# Altium PCB PCB_worm_robot_control_v1.PcbDoc
Units mm, origin at the board's own origin, x right, y up, seen from the top; angles counter-clockwise.
Board outline 255.84 x 36.78 mm, 2 copper layers (Top Layer, Bottom Layer); 47 components, 54 nets, 389 pads, 33 vias.
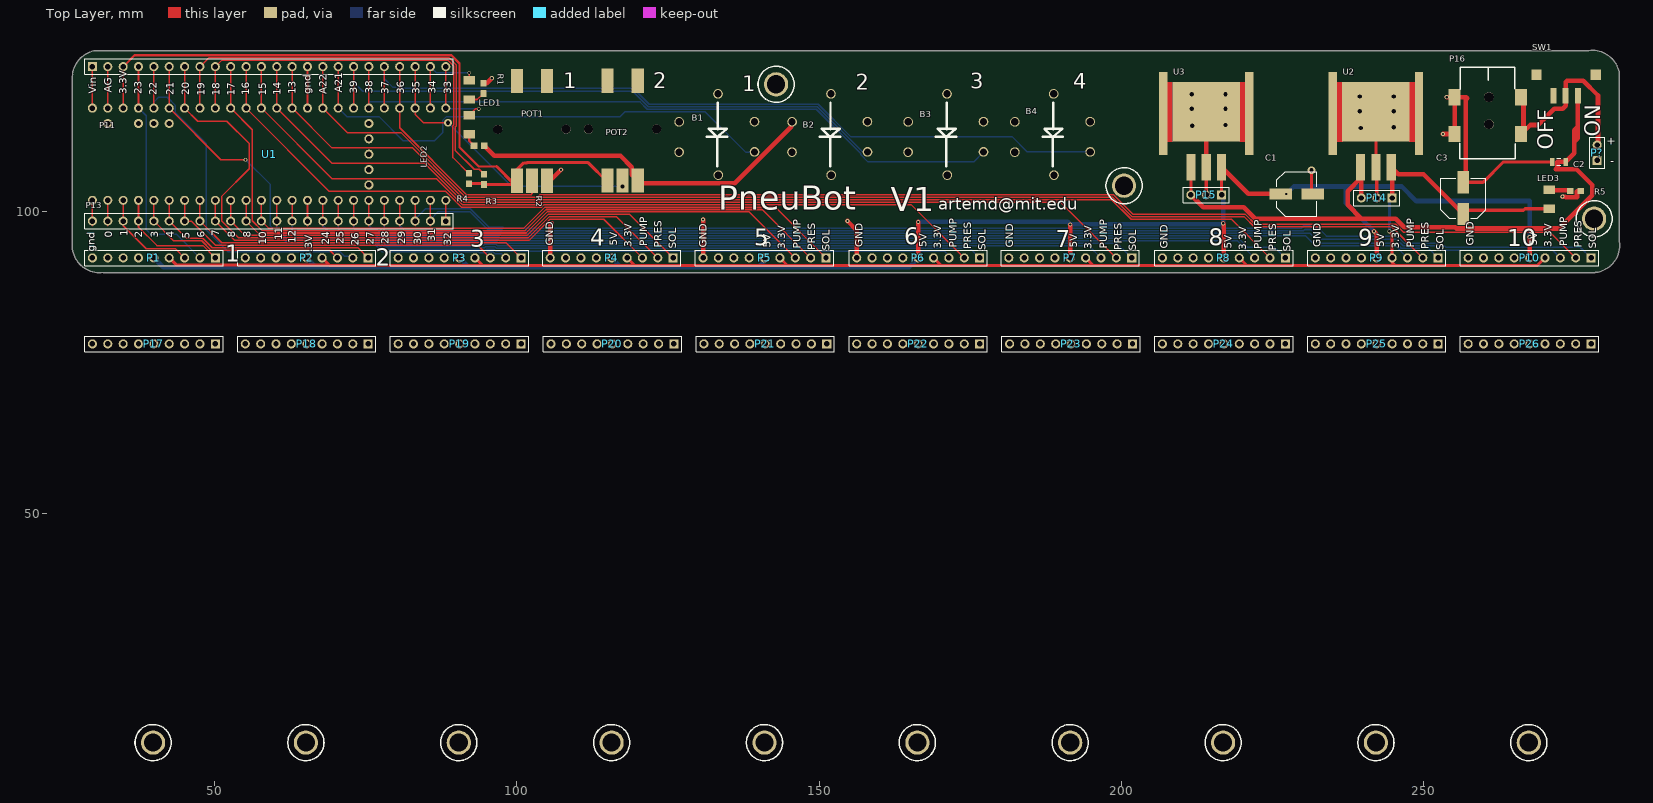
[diagram p0: Top Layer view]
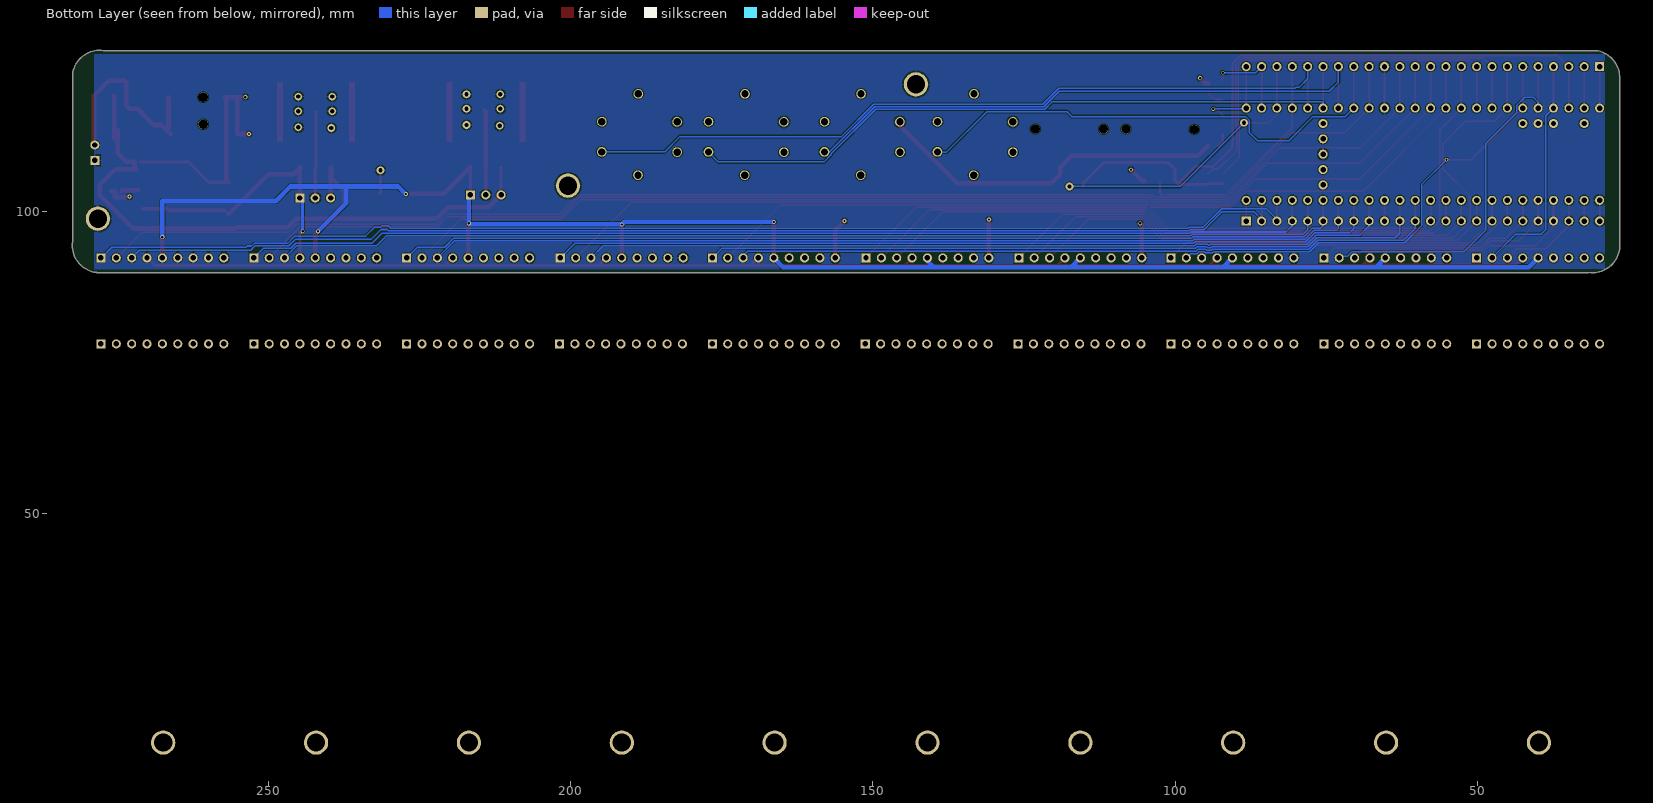
[diagram p1: Bottom Layer view, seen from below]

## Layer stack, top to bottom
Top Solder: solder mask 0.0102, Solder Resist, Dk 3.5
Top Layer: signal copper 0.0356
Dielectric 1: dielectric 0.32, FR-4, Dk 4.8
Bottom Layer: signal copper 0.0356
Bottom Solder: solder mask 0.0102, Solder Resist, Dk 3.5

## Board outline
26.545,93.819 cw(c26.797,93.853) 26.543,93.853 26.543,121.592 cw(c31.06,122.111) 30.455,126.617 cw(c30.489,126.365) 30.609,126.589 cw(c30.729,126.365) 30.729,126.619 277.224,126.619 cw(c277.812,122.111) 282.319,122.716 cw(c282.067,122.682) 282.321,122.682 cw(c282.067,122.682) 282.313,122.618 cw(c282.067,122.555) 282.321,122.555 282.321,95.013 cw(c277.812,94.424) 282.36,94.424 cw(c277.812,94.424) 278.418,89.918 cw(c278.384,90.17) 278.32,89.924 cw(c278.257,90.17) 278.257,89.916 31.64,89.916 cw(c31.051,94.424)

## Design rules (kind name [scope] priority, off if disabled: settings)
Clearance [All] p1: gap=0.152 ignorepadtopadclearanceinfootprint=FALSE
PolygonConnect [All] p1: connectstyle=Relief reliefconductorwidth=0.254 reliefentries=4 polygonreliefangle="90 Angle" airgapwidth=0.254
RoomDefinition Schematic_worm_robot_control_v1 [InComponentClass('Schematic_worm_robot_control_v1')] p1 off: confinementstyle=ConfineIn formatcopy=TRUE lockcomponents=FALSE outline 283.464,91.313 295.275,91.313 295.275,110.744 283.464,110.744
RoutingVias [All] p1: holewidth=0.381 width=0.635 viastyle="Through Hole" minholewidth=0.381 minwidth=0.635 maxholewidth=0.711 maxwidth=1.27
SolderMaskExpansion [All] p1: expansion=0.102
Width [All] p1: maxlimit=0.762 minlimit=0.152 preferedwidth=0.254
30 further rules are at their usual default settings.

## Classes and differential pairs
component class Schematic_worm_robot_control_v1: B1 B2 B3 B4 C1 C2 C3 LED1 LED2 LED3 P1 P2 P3 P4 P5 P6 P7 P8 P9 P10 P11 P13 P14 P15 P16 P? POT1 POT2 POT? R1 R2 R3 R4 R5 SW1 U1 U2 U3

## Components (designator, comment, footprint, x,y, rotation, side; value= is the part's Value field where it differs from the comment)
B1 "BUTTON 12MM LED LIGHT" "12MM BUTTON LED LIGHT" 132.005,109.094 r180 top
B2 "BUTTON 12MM LED LIGHT" "12MM BUTTON LED LIGHT" 150.674,109.094 r180 top
B3 "BUTTON 12MM LED LIGHT" "12MM BUTTON LED LIGHT" 169.861,109.094 r180 top
B4 "BUTTON 12MM LED LIGHT" "12MM BUTTON LED LIGHT" 187.504,109.094 r180 top
C1 "Electrolytic Cap 100uF smd" "F80 Electrolytic cap" 228.981,102.87 r0 top
C2 "10uF 16V" CAP0805 272.288,108.204 r180 top
C3 "Electrolytic Cap 100uF smd" "F80 Electrolytic cap" 256.54,102.235 r90 top
LED1 "LED BLUE" RES_1206_SMD 93.091,120.142 r270 top
LED2 "LED RED" RES_1206_SMD 93.091,114.427 r270 top
LED3 "LED BLUE" RES_1206_SMD 269.769,101.981 r90 top
P1 "Header 9" HDR1X9 50.165,92.329 r180 top
P2 "Header 9" HDR1X9 75.438,92.329 r180 top
P3 "Header 9" HDR1X9 100.711,92.329 r180 top
P4 "Header 9" HDR1X9 125.857,92.329 r180 top
P5 "Header 9" HDR1X9 151.13,92.329 r180 top
P6 "Header 9" HDR1X9 176.53,92.329 r180 top
P7 "Header 9" HDR1X9 201.676,92.329 r180 top
P8 "Header 9" HDR1X9 227.076,92.329 r180 top
P9 "Header 9" HDR1X9 252.349,92.329 r180 top
P10 "Header 9" HDR1X9 277.622,92.329 r180 top
P11 "Header 24" HDR1X24 29.845,123.952 r0 top
P13 "Header 24" HDR1X24 88.265,98.425 r180 top
P14 "Header 3" HDR1X3 244.729,102.235 r180 top
P15 "Header 3" HDR1X3 216.535,102.743 r180 top
P16 "Barrel jack 5.5/2.1" ADC-028-2 260.941,121.221 r270 top
P17 "Header 9" HDR1X9 50.165,78.105 r180 top (schematic designator P2)
P18 "Header 9" HDR1X9 75.438,78.105 r180 top (schematic designator P2)
P19 "Header 9" HDR1X9 100.711,78.105 r180 top (schematic designator P2)
P20 "Header 9" HDR1X9 125.984,78.105 r180 top (schematic designator P2)
P21 "Header 9" HDR1X9 151.257,78.105 r180 top (schematic designator P2)
P22 "Header 9" HDR1X9 176.53,78.105 r180 top (schematic designator P2)
P23 "Header 9" HDR1X9 201.803,78.105 r180 top (schematic designator P2)
P24 "Header 9" HDR1X9 227.076,78.105 r180 top (schematic designator P2)
P25 "Header 9" HDR1X9 252.349,78.105 r180 top (schematic designator P2)
P26 "Header 9" HDR1X9 277.622,78.105 r180 top (schematic designator P2)
P? "Header 2" HDR1X2 278.638,108.458 r90 top
POT1 "Potentiometer large" PRS11S 101.981,113.641 r0 top
POT2 "Potentiometer large" PRS11S 116.967,113.665 r0 top
R1 "330" 0603W 94.488,120.396 r270 top
R2 "330" 0603W 93.801,110.871 r180 top
R3 "10K" 0603W 94.615,105.283 r90 top
R4 "10K" 0603W 92.075,105.423 r90 top
R5 "330" 0603W 275.082,103.378 r180 top
SW1 "ON_OFF_SWITCH" "SS321 Switch" 275.417,119.059 r270 top
U1 "TEENSY 3.6" "TEENSY 3.6" 45.663,110.003 r90 top
U2 "MIC29300" TO263 240.481,109.908 r0 top
U3 "MIC29300" TO263 212.414,109.908 r0 top

## Footprints (in the part's own frame and the unit in brackets; to place one, negate y for a bottom-side part, rotate by r counter-clockwise, add the part's x,y. Pads: shape width x height; smd on the part's side, far side on the other; paste and mask are expansions set on the pad)
"12MM BUTTON LED LIGHT" [mm]
  round 1.6 hole 1.2: 1(-7.314,-0.761) 2(5.16,-0.722) 3(-7.304,-5.751) 4(5.152,-5.732) 5(-1.274,-10.357) 6(-1.319,3.084)
  silkscreen extent -2.79,-8.92 0.56,1.6, body extent -7.52,-9.59 5.18,2.41, height 7.68
0603W [mm]
  rect 1.1x1 smd: 1(-0.825,0) 2(0.875,0)
  body extent -0.8,-0.4 0.8,0.4, height 0.45
ADC-028-2 [mm] "2.1/5.5mm barrel jack"
  rect 2.7x2 smd: 1(2.308,5.112) 1(8.408,5.112) 2(2.308,-5.888) 2(8.408,-5.888)
  round 1.6 hole 1.6: 2(2.309,-0.204) 3(6.794,-0.21)
  silkscreen extent -2.62,-5 12.5,4.11, body extent -2.57,-6.81 12.23,6.02, height 11.5
CAP0805 [mm]
  rect 0.75x1.35 smd: 1(-1.133,0.003) 2(1.117,0.003)
  silkscreen extent -0.36,-0.57 0.34,0.58, body extent -1.01,-0.62 0.99,0.63, height 0.78
"F80 Electrolytic cap" [mm]
  rect 3.7x1.85 smd: 1(-2.653,0.04) 2(2.597,0.04)
  silkscreen extent -3.33,-3.66 3.27,3.74, body extent -3.43,-3.66 3.37,3.74, height 8
HDR1X2 [mm] "Connector; Header; 2 Position"
  rect 1.5x1.5 hole 0.9: 1(0,0)
  round 1.5 hole 0.9: 2(2.54,0)
  silkscreen extent -1.27,-1.27 3.81,1.27
HDR1X3 [mm] "Connector; Header; 3 Position"
  rect 1.5x1.5 hole 0.9: 1(0,0)
  round 1.5 hole 0.9: 2(2.54,0) 3(5.08,0)
  silkscreen extent -1.27,-1.27 6.35,1.27
HDR1X9 [mm] "Connector; Header; 9 Position"
  rect 1.5x1.5 hole 0.9: 1(0,0)
  round 1.5 hole 0.9: 2(2.54,0) 3(5.08,0) 4(7.62,0) 5(10.16,0) 6(12.7,0) 7(15.24,0) 8(17.78,0) 9(20.32,0)
  silkscreen extent -1.27,-1.27 21.59,1.27
HDR1X24 [mm] "Connector; Header; 24 Position"
  rect 1.5x1.5 hole 0.9: 1(0,0)
  round 1.5 hole 0.9: 2(2.54,0) 3(5.08,0) 4(7.62,0) 5(10.16,0) 6(12.7,0) 7(15.24,0) 8(17.78,0) 9(20.32,0) 10(22.86,0) 11(25.4,0) 12(27.94,0) 13(30.48,0) 14(33.02,0) 15(35.56,0) 16(38.1,0) 17(40.64,0) 18(43.18,0) 19(45.72,0) 20(48.26,0) 21(50.8,0) 22(53.34,0) 23(55.88,0) 24(58.42,0)
  silkscreen extent -1.27,-1.27 59.69,1.27
PRS11S [mm] "SMD Potentiometer"
  rect 2x4 smd: 1(-1.956,-8.544) 2(0.544,-8.544) 3(3.044,-8.544) 4(-1.956,7.956) 5(3.044,7.956)
  round 1.5 hole 1.5: 6(-5.121,-0.056) 7(6.178,-0.024)
  body extent -6.01,-9.33 6.99,9.17, height 20
RES_1206_SMD [mm]
  rect 1.4x1.9 smd: 1(-1.525,-0.95) 2(1.625,-0.95)
  body extent -1.55,-1.9 1.8,0, height 0.5
"SS321 Switch" [mm] "SPDT Slide Switch"
  rect 2.55x1 smd: 1(-0.067,-3.987) 2(-0.067,-1.986) 3(-0.067,0.017)
  rect 1.7x1.7 smd: 4(-3.54,-6.814) 5(-3.547,2.985)
  body extent -6.86,-7.15 0.53,3.34, height 3.05
"TEENSY 3.6" [mm]
  round 1.5 hole 0.9: 1(-8.149,15.818) 2(-8.149,13.278) 3(-8.149,10.738) 4(-8.149,8.198) 5(-8.149,5.658) 6(-8.149,3.118) 7(-8.149,0.578) 8(-8.149,-1.962) 9(-8.149,-4.502) 10(-8.149,-7.042) 11(-8.149,-9.582) 12(-8.149,-12.122) 13(-8.149,-14.662) 14(-8.149,-17.202) 15(7.091,-17.202) 16(7.091,-14.662) 17(7.091,-12.122) 18(7.091,-9.582) 19(7.091,-7.042) 20(7.091,-4.502) 21(7.091,-1.962) 22(7.091,0.578) 23(7.091,3.118) 24(7.091,5.658) 25(7.091,8.198) 26(7.091,10.738) 27(7.091,13.278) 28(7.091,15.818) 29(-5.609,-29.902) 30(-3.069,-29.902) 31(-0.529,-29.902) 32(2.011,-29.902) 33(4.551,-29.902) 34(4.551,13.278) 35(4.551,8.198) 36(4.551,5.658) 37(4.551,3.118) 38(-8.149,-19.742) 39(-8.149,-22.282) 40(-8.149,-24.822) 41(-8.149,-27.362) 42(-8.149,-29.902) 43(-8.149,-32.442) 44(-8.149,-34.982) 45(-8.149,-37.522) 46(-8.149,-40.062) 47(-8.149,-42.602) 48(7.091,-19.742) 49(7.091,-22.282) 50(7.091,-24.822) 51(7.091,-27.362) 52(7.091,-29.902) 53(7.091,-32.442) 54(7.091,-34.982) 55(7.091,-37.522) 56(7.091,-40.062) 57(7.091,-42.602)
  body extent -9.34,-43.87 8.53,18.09, height 7.29
TO263 [mil] "voltage regulator high currrent"
  rect 60x170 smd: 1(-37.74,-102.1) 2(62.26,-102.1) 3(162.26,-102.1)
  rect 440x390 smd: 4(61.33,259.49)
  body extent -136,-155 258,471, height 169

## Part data
C1 C3: "100uF 25 VSMD", digikey part number=565-2549-1-ND, manufacturer="United Chemi-Con", manufacturer part number=EMZA250ADA101MF80G, Supplier Part Number 1=565-2549-6-ND, Supplier 1=Digikey
C2: library part "Polarized Cap"
LED1 LED3: library part LED, "LED SMD 1206/0603", Supplier Part Number 1=LNJ947W8CRACT-ND, Supplier 1=Digikey
LED2: library part LED, "LED SMD 1206/0603", Supplier Part Number 1=LNJ247W82RACT-ND, Supplier 1=Digikey
P1 P2 P3 P4 P5 P6 P7 P8 P9 P10 P17 P18 P19 P20 P21 P22 P23 P24 P25 P26: "Header, 9-Pin", LatestRevisionDate=17-Jul-2002, LatestRevisionNote="Re-released for DXP Platform.", Publisher="Altium Limited"
P11 P13: "Header, 24-Pin", LatestRevisionDate=17-Jul-2002, LatestRevisionNote="Re-released for DXP Platform.", Publisher="Altium Limited"
P14 P15: "Header, 3-Pin", LatestRevisionDate=17-Jul-2002, LatestRevisionNote="Re-released for DXP Platform.", Publisher="Altium Limited"
P16: sparkfun part number=12748
P?: "Header, 2-Pin", LatestRevisionDate=17-Jul-2002, LatestRevisionNote="Re-released for DXP Platform.", Publisher="Altium Limited"
POT1 POT2: "SMD Large pot for audio", Supplier Part Number 1=PRS11S-N20F-103B1-ND, Supplier 1=Digikey
R1 R2 R5: library part Resistor, Supplier Part Number 1=311-330JRCT-ND, digikey number=RMCF0603FT10K0CT-ND, Supplier 1=Digikey
R3 R4: library part Resistor, Supplier Part Number 1=311-10KJRCT-ND, Supplier 1=Digikey
SW1: "SPDT SMD Side Switch", digikey number=563-1102-1-ND, Sparkfun#=COM-00597
U2 U3: "3A LDO", Supplier Part Number 1=MIC29300-3.3WU-CT-ND, Supplier 1=Digi-Key

## Free pads (board coordinates)
  round 4 hole 3: 11(39.87,12.192) 11(65.143,12.192) 11(90.416,12.192) 11(115.689,12.192) 11(140.962,12.192) 11(142.875,121.031) 11(166.235,12.192) 11(191.508,12.192) 11(200.406,104.267) 11(216.781,12.192) 11(242.054,12.192) 11(267.327,12.192) 11(278.13,98.806)
  rect 1.4x13.72 smd: 19(206.883,116.205) 19(221.107,116.205) 19(234.95,116.205) 19(249.174,116.205)

## Via types
v1: diameter 0.635, hole 0.381, Top Layer to Bottom Layer, tented both sides, 18 vias
v2: diameter 1.27, hole 0.711, Top Layer to Bottom Layer, 12 vias
v3: diameter 1.27, hole 0.711, Top Layer to Bottom Layer, tented both sides, 3 vias

## Nets (pads, with @x,y where several pads share a name; then routed paths per layer and width w, separated by ;. In a path a pad name is that pad's centre, name@x,y a point inside that pad or via, vN(x,y) a via of type N, cw(c..) or ccw(c..) an arc to the next point about the centre after c; other vN are vias at no path point)
3.3V_MCU: P11.3 POT1.1 POT2.1 R3.1 R4.1 U1.26 | length 116.9
  Top Layer w0.254: U1.26 P11.3
  Top Layer w0.381: P11.3 36.831,125.858 89.183,125.858 90.551,124.49 90.551,110.617 93.726,107.442 96.687,107.442
  Top Layer w0.508: R4.1 94.475,104.598 R3.1 99.386,104.458 POT1.1@99.529,104.601 ; 96.687,107.442 POT1.1@99.529,104.601 ; POT2.1@115.011,104.867 111.8,108.077 101.716,108.077 101.69,108.052 101.168,108.052 100.025,106.908 POT1.1 POT1.1@99.529,104.601 ; POT2.1@115.054,104.91 115.138,104.826 POT2.1@115.138,104.105
3.3V_MOTORS: C3.1 LED3.1 P1.4 P2.4 P3.4 P4.4 P5.4 P6.4 P7.4 P8.4 P9.4 P10.4 P14.1 U2.3 | length 287.3
  Top Layer w0.508: P1.4 43.701,91.173 68.821,91.173 68.897,91.249 ; P2.4 68.897,91.249 ; P3.4 94.361,91.059 ; P4.4 119.507,91.059 ; P5.4 144.78,91.059 ; P6.4 170.18,91.059 ; P7.4 195.326,91.059 ; P8.4 220.726,91.059 ; v1(244.274,96.721) 244.729,96.266 P9.4 244.729,91.567 245.237,91.059 ; C3.1 257.121,100.203 266.46,100.203 266.713,100.456 LED3.1 ; P10.4 268.732,91.059 245.237,91.059 ; 68.897,91.249 69.088,91.059 94.361,91.059 ; 94.361,91.059 119.507,91.059 ; 119.507,91.059 144.78,91.059 ; 144.78,91.059 170.18,91.059 ; 170.18,91.059 195.326,91.059 ; 195.326,91.059 220.726,91.059 ; 220.726,91.059 245.237,91.059
  Top Layer w0.762: U2.3 U2.3@244.729,107.188 ; P14.1 U2.3@244.729,107.188 ; C3.1 249.911,106.172 245.745,106.172 U2.3@244.729,107.188
  Bottom Layer w0.508: v1(244.274,96.721) 244.274,101.78 P14.1
5V: C1.1 P1.5 P2.5 P3.5 P4.5 P5.5 P6.5 P7.5 P8.5 P9.5 P10.5 P15.1 U3.3 | length 290
  Top Layer w0.508: P15.1 U3.3
  Top Layer w0.762: P6.5 v1(166.37,98.276) ; P7.5 v1(191.516,97.836) ; U3.3 220.94,102.91 C1.1 ; v1(216.789,98.044) 216.916,97.917 P8.5 ; v1(241.734,96.721) 242.189,96.266 P9.5 ; P10.5 v1(267.462,95.758)
  Bottom Layer w0.762: P1.5 41.529,90.805 66.802,90.805 ; P2.5 66.802,90.805 ; P3.5 92.075,90.805 ; P4.5 117.221,90.805 ; P5.5 140.97,91.821 139.954,90.805 ; P6.5 164.846,90.805 139.954,90.805 ; v1(166.37,98.276) 191.076,98.276 191.46,97.892 216.637,97.892 v1(216.789,98.044) 216.789,102.489 P15.1 ; v1(227.203,102.879) 228.464,104.14 237.109,104.14 ; v1(241.734,96.721) 237.109,101.346 237.109,104.14 ; v1(267.462,95.758) 267.462,101.729 248.712,101.729 246.301,104.14 237.109,104.14 ; 66.802,90.805 92.075,90.805 ; 92.075,90.805 117.221,90.805 ; 117.221,90.805 139.954,90.805
9V: P16.1 P?.2 SW1.2 | length 33
  Top Layer w0.762: P16.1@266.053,112.814 267.539,114.3 268.859,114.3 271.526,116.967 272.923,116.967 273.431,117.475 SW1.2 273.431,121.412 273.64,121.621 276.328,121.621 278.765,119.184 P?.2@278.765,110.998 ; P16.1@266.46,113.778 P16.1@266.46,118.912
BUTTON_1: B1.1 P11.17 U1.50 | length 83.9
  Top Layer w0.254: U1.50 P11.17
  Bottom Layer w0.254: U1.50 71.882,115.697 77.216,115.697 81.199,111.714 86.423,111.714 87.732,113.023 87.732,115.06 88.369,115.697 117.094,115.697 117.907,116.51 131.14,116.51 137.832,109.818 B1.1@139.319,109.818
BUTTON_2: B2.1 P11.18 U1.51 | length 99.2
  Top Layer w0.254: U1.51 P11.18
  Bottom Layer w0.254: P11.18 73.025,121.412 74.549,119.888 119.186,119.888 121.752,117.323 149.698,117.323 157.203,109.818 B2.1@157.988,109.818
BUTTON_3: B3.1 P11.19 U1.52 | length 114.4
  Top Layer w0.254: U1.52 P11.19
  Bottom Layer w0.254: U1.52 75.565,118.123 120.376,118.123 121.583,116.916 149.53,116.916 156.909,109.537 156.909,109.371 158.075,108.204 175.561,108.204 B3.1@177.175,109.818
BUTTON_4: B4.1 P11.20 U1.53 | length 130.6
  Top Layer w0.254: U1.53 P11.20
  Bottom Layer w0.254: P11.20 78.105,121.954 79.536,120.523 80.078,120.523 80.219,120.383 119.266,120.383 121.92,117.729 149.866,117.729 155.2,112.395 181.882,112.395 184.422,109.855 B4.1
GND: B1.4 B2.4 B3.4 B4.4 C1.2 C2.2 C3.2 P1.9 P2.9 P3.9 P4.9 P5.9 P6.9 P7.9 P8.9 P9.9 P10.9 P11.15 P13.24 P14.2 P15.2 P16.2@255.053,112.814 P16.2@255.053,118.914 P?.1 pad.11@142.875,121.031 pad.11@200.406,104.267 pad.11@278.13,98.806 pad.19 POT1.3 POT2.3 R1.1 R2.1 R5.1 U1.1 U1.31 U1.48 U2.2 U2.4 U3.2 U3.4 | length 171.2
  Top Layer w0.254: 29.845,97.663 P13.24 U1.1 ; U1.48 P11.15 ; U3.2@213.995,106.807 U3.2
  Top Layer w0.508: P15.2 U3.2@213.995,106.807 ; U3.4@214.225,116.88 U3.4@214.249,116.857 ; v3(231.394,106.807) 231.394,103.094 C1.2 ; U2.4 242.062,116.476 U2.2 242.189,107.188 P14.2 ; C3.2@256.921,104.832 259.772,104.832 263.141,108.201 C2.2
  Top Layer w0.762: R1.1 95.059,121.221 v1(95.885,122.047) ; R2.1 96.266,109.231 117.155,109.231 119.044,107.342 119.044,106.087 POT2.3 120.455,104.677 136.026,104.677 145.361,114.012 145.361,114.629 B2.4@145.522,114.789 ; POT1.3 105.504,105.097 v1(107.315,106.908) ; P4.9 105.537,97.79 v1(105.791,98.044) ; P5.9 v1(130.81,98.679) ; v1(154.686,98.425) 156.21,96.901 P6.9 ; U3.2 U3.4@213.995,116.476 ; v1(253.149,112.814) 255.053,112.814 P16.2@255.053,118.914 ; v1(253.742,118.914) P16.2@255.053,118.914 ; C3.2 256.921,104.832 256.921,118.491 257.175,118.745 257.006,118.914 P16.2@255.053,118.914 ; v1(272.902,102.468) 273.313,102.468 273.436,102.345 275.29,102.345 275.29,103.378 R5.1
  other v2: 239.522,113.792 244.983,113.919 211.709,114.173 217.17,114.3 239.395,116.586 244.983,116.586 211.582,116.967 217.17,116.967 239.395,118.999 244.983,118.999 211.582,119.38 217.17,119.38
LED_1: LED1.1 P11.23 U1.56 | length 15.2
  Top Layer w0.254: U1.56 P11.23 ; LED1.1 v1(92.141,122.936)
  Bottom Layer w0.254: U1.56@85.546,116.915 U1.56 ; P11.23 86.754,122.923 91.427,122.923 91.44,122.936 v1(92.141,122.936)
LED_2: LED2.1 P11.24 U1.57 | length 14.4
  Top Layer w0.254: U1.57 P11.24 ; LED2.1 93.156,116.967 v1(93.726,116.967)
  Bottom Layer w0.254: U1.57 88.392,116.967 v1(93.726,116.967)
NetLED1_2: LED1.2 R1.2 | length 2.8
  Top Layer w0.254: LED1.2 93.484,118.517 R1.2
NetLED2_2: LED2.2 R2.2 | length 2.3
  Top Layer w0.381: LED2.2 92.141,111.656 R2.2
NetLED3_2: LED3.2 R5.2 | length 2.8
  Top Layer w0.762: LED3.2@271.469,103.513 274.072,103.513 R5.2
NetP11_1: P11.1 U1.28 | length 6.9
  Top Layer w0.254: U1.28 P11.1
NetP11_2: P11.2 U1.27 | length 6.9
  Top Layer w0.254: U1.27 P11.2
NetP13_1: P13.1 U1.47 | length 3.4
  Top Layer w0.254: P13.1 U1.47
NetP13_10: P13.10 U1.38 | length 4.2
  Top Layer w0.254: 65.405,97.663 U1.38
NetP13_23: P13.23 U1.2 | length 4.2
  Top Layer w0.254: 32.385,97.663 U1.2
POT_1: P11.21 POT1.2 U1.54 | length 38.6
  Top Layer w0.254: P11.21 U1.54 80.645,113.831 91.707,102.768 102.387,102.768 102.525,102.906 POT1.2@102.525,104.867
POT_2: P11.22 POT2.2 U1.55 | length 47.1
  Top Layer w0.254: P11.22 U1.55 83.185,116.078 84.582,114.681 v3(88.646,114.681)
  Bottom Layer w0.254: v3(88.646,114.681) 99.187,104.14 v3(117.475,104.14)
PRESSURE_1: P1.2 P11.4 U1.25 | length 38.3
  Top Layer w0.254: U1.25 P11.4
  Bottom Layer w0.254: U1.25 38.735,115.824 38.735,97.028 39.497,96.266 43.688,96.266 P1.2
PRESSURE_2: P3.2 P11.6 U1.23 | length 77.4
  Top Layer w0.254: P11.6 U1.23 51.08,108.559 v1(55.166,108.559)
  Bottom Layer w0.254: U1.23@42.545,116.586 U1.23 ; v1(55.166,108.559) 59.267,104.457 59.267,97.614 62.05,94.832 76.278,94.832 77.751,93.358 93.68,93.358 93.871,93.167 95.013,93.167 95.205,93.358 96.057,93.358 96.401,93.015 97.485,93.015 P3.2
PRESSURE_3: P2.2 P11.5 U1.24 | length 61.2
  Top Layer w0.254: U1.24 P11.5
  Bottom Layer w0.254: U1.24 40.005,118.11 40.767,118.872 42.223,118.872 43.574,117.52 43.574,116.319 48.654,111.239 48.654,96.948 52.244,93.358 70.784,93.358 71.534,92.608 72.619,92.608 P2.2
PRESSURE_4: P6.2 P11.11 U1.18 | length 136.2
  Top Layer w0.254: P11.11 U1.18 68.974,103.365 88.21,103.365 90.838,100.736 104.101,100.736 104.507,101.143 165.176,101.143 P6.2
PRESSURE_5: P5.2 P11.10 U1.19 | length 124.7
  Top Layer w0.254: P11.10 U1.19 56.274,113.525 56.274,98.48 57.904,96.85 101.364,96.85 104.844,100.33 140.589,100.33 P5.2
PRESSURE_6: P4.2 P11.7 U1.22 | length 112.2
  Top Layer w0.254: P11.7 U1.22 47.244,114.935 52.07,114.935 55.763,111.242 55.763,107.057 51.194,102.489 51.194,98.48 54.043,95.631 101.869,95.631 105.349,99.111 116.535,99.111 P4.2
PRESSURE_7: P10.2 P11.16 U1.49 | length 224.6
  Top Layer w0.254: P11.16 U1.49 71.996,113.043 80.858,113.043 91.539,102.362 103.428,102.362 103.834,102.768 198.681,102.768 201.932,99.517 220.478,99.517 222.114,97.881 245.328,97.881 246.67,96.538 270.873,96.538 P10.2
PRESSURE_8: P9.2 P11.14 U1.15 | length 204.4
  Top Layer w0.254: P11.14 U1.15 69.456,110.503 82.796,110.503 91.343,101.956 103.596,101.956 104.002,102.362 198.513,102.362 201.764,99.111 220.31,99.111 221.946,97.474 244.664,97.474 P9.2
PRESSURE_9: P8.2 P11.13 U1.16 | length 181.7
  Top Layer w0.254: P11.13 U1.16 69.456,107.963 84.761,107.963 91.175,101.549 103.764,101.549 104.171,101.956 198.344,101.956 201.596,98.704 218.161,98.704 P8.2
PRESSURE_10: P7.2 P11.12 U1.17 | length 158.8
  Top Layer w0.254: P11.12 U1.17 69.456,105.423 86.726,105.423 91.007,101.143 103.933,101.143 104.339,101.549 189.916,101.549 P7.2
PUMP_1: P1.3 P13.22 U1.3 | length 16.6
  Top Layer w0.254: U1.3 34.925,97.663 38.735,93.853 43.561,93.853 P1.3
PUMP_2: P3.3 P13.18 U1.7 | length 56.5
  Top Layer w0.254: U1.7 P13.18 45.132,98.378 46.216,98.378 50.182,94.412 93.548,94.412 P3.3
PUMP_3: P2.3 P13.20 U1.5 | length 36.3
  Top Layer w0.254: U1.5 P13.20 43.267,95.163 47.906,95.163 49.47,93.599 69.088,93.599 P2.3
PUMP_4: P6.3 P13.12 U1.13 | length 118.2
  Top Layer w0.254: 60.325,97.663 U1.13
  Bottom Layer w0.254: 60.325,97.663 60.325,97.185 62.272,95.238 76.447,95.238 77.92,93.765 93.849,93.765 94.04,93.574 94.845,93.574 95.036,93.765 96.226,93.765 96.569,93.421 170.739,93.421 171.45,92.71 P6.3
PUMP_5: P5.3 P13.14 U1.11 | length 99.6
  Top Layer w0.254: U1.11 P13.14 57.226,96.444 101.533,96.444 105.012,99.924 138.455,99.924 P5.3
PUMP_6: P4.3 P13.16 U1.9 | length 79.4
  Top Layer w0.254: U1.9 P13.16 53.365,95.225 102.038,95.225 105.517,98.704 114.402,98.704 P4.3
PUMP_7: P10.3 P13.2 U1.46 | length 195.1
  Top Layer w0.254: 85.725,97.663 P13.2 U1.46
  Bottom Layer w0.254: P13.2 85.725,98.679 86.995,99.949 92.262,99.949 95.195,97.016 97.572,97.016 97.764,96.825 230.048,96.825 230.251,97.028 231.313,97.028 232.964,95.377 245.501,95.377 246.555,94.323 252.133,94.323 252.857,93.599 271.272,93.599 P10.3
PUMP_8: P9.3 P13.5 U1.43 | length 175.9
  Top Layer w0.254: 78.105,97.663 U1.43
  Bottom Layer w0.254: 78.105,97.663 78.105,97.028 78.93,96.203 97.236,96.203 97.427,96.012 230.378,96.012 232.029,94.361 245.237,94.361 P9.3
PUMP_9: P8.3 P13.7 U1.41 | length 155.7
  Top Layer w0.254: 73.025,97.663 U1.41
  Bottom Layer w0.254: 73.025,97.663 73.025,97.185 73.346,96.864 77.12,96.864 78.593,95.39 96.899,95.39 97.09,95.199 219.126,95.199 P8.3
PUMP_10: P7.3 P13.9 U1.39 | length 135.2
  Top Layer w0.254: 67.945,97.663 U1.39
  Bottom Layer w0.254: 67.945,97.663 69.557,96.051 76.783,96.051 78.256,94.578 94.185,94.578 94.376,94.386 94.508,94.386 94.7,94.578 96.562,94.578 96.804,94.336 194.589,94.336 P7.3
SCL: P11.8 R3.2 U1.21 | length 70.9
  Top Layer w0.254: U1.21 P11.8 49.061,125.388 88.86,125.388 89.967,124.281 89.967,114.134 89.852,114.019 89.852,110.083 92.963,106.972 93.801,106.972 R3.2
SDA: P11.9 R4.2 U1.20 | length 66
  Top Layer w0.254: U1.20 P11.9 51.194,124.981 88.691,124.981 89.56,124.112 89.56,114.302 89.445,114.187 89.445,108.928 R4.2
SOLENOID_1: P1.1 P13.21 U1.4 | length 19.2
  Top Layer w0.254: U1.4 37.465,97.663 37.465,97.409 40.513,94.361 48.133,94.361 P1.1
SOLENOID_2: P3.1 P13.17 U1.8 | length 59
  Top Layer w0.254: U1.8 P13.17 51.232,94.818 98.222,94.818 P3.1
SOLENOID_3: P2.1 P13.19 U1.6 | length 38.8
  Top Layer w0.254: U1.6 P13.19 45.401,95.569 48.074,95.569 49.638,94.005 73.762,94.005 P2.1
SOLENOID_4: P6.1 P13.11 U1.14 | length 120.2
  Top Layer w0.254: P13.11 U1.14
  Bottom Layer w0.254: 62.865,97.663 62.865,96.393 63.614,95.644 76.615,95.644 78.088,94.171 94.017,94.171 94.208,93.98 94.677,93.98 94.868,94.171 96.394,94.171 96.636,93.929 174.93,93.929 P6.1
SOLENOID_5: P5.1 P13.13 U1.12 | length 102.2
  Top Layer w0.254: U1.12 P13.13 58.953,97.257 101.196,97.257 104.676,100.736 142.723,100.736 P5.1
SOLENOID_6: P4.1 P13.15 U1.10 | length 82
  Top Layer w0.254: U1.10 P13.15 55.093,96.037 101.701,96.037 105.181,99.517 118.669,99.517 P4.1
SOLENOID_7: P10.1 P13.3 U1.45 | length 203.4
  Top Layer w0.254: 83.185,97.663 P13.3 U1.45
  Bottom Layer w0.254: P13.3 83.185,98.72 84.922,100.457 92.329,100.457 95.364,97.422 97.741,97.422 97.932,97.231 229.692,97.231 230.124,97.663 231.14,97.663 231.369,97.434 232.363,97.434 233.862,95.935 245.568,95.935 246.774,94.729 252.301,94.729 252.733,94.297 253.428,94.297 253.619,94.107 275.844,94.107 P10.1
SOLENOID_8: P9.1 P13.4 U1.44 | length 178.1
  Top Layer w0.254: 80.645,97.663 U1.44
  Bottom Layer w0.254: 80.645,97.663 81.698,96.61 97.404,96.61 97.595,96.418 231.14,96.418 232.791,94.767 245.405,94.767 246.256,93.916 250.761,93.916 P9.1
SOLENOID_9: P8.1 P13.6 U1.42 | length 157.9
  Top Layer w0.254: 75.565,97.663 U1.42
  Bottom Layer w0.254: 75.565,97.663 75.958,97.27 77.288,97.27 78.761,95.797 97.067,95.797 97.259,95.606 219.294,95.606 220.793,94.107 225.298,94.107 P8.1
SOLENOID_10: P7.1 P13.8 U1.40 | length 138
  Top Layer w0.254: 70.485,97.663 U1.40
  Bottom Layer w0.254: 70.485,97.663 70.485,97.155 71.183,96.457 76.952,96.457 78.425,94.984 94.354,94.984 94.442,94.895 94.531,94.984 96.731,94.984 96.973,94.742 199.263,94.742 P7.1
VRAW: C2.1 P14.3 P15.3 SW1.3 U2.1 U3.1 | length 117
  Top Layer w0.508: P15.3 U3.1
  Top Layer w0.762: P15.3 213.487,100.711 220.218,100.711 222.123,98.806 239.649,98.806 ; P14.3 239.649,107.188 U2.1 239.522,105.537 237.363,103.378 237.363,101.092 239.649,98.806 ; SW1.3 275.434,114.017 ; 239.649,98.806 245.336,98.806 246.733,97.409 255.144,97.409 255.354,97.199 272.332,97.199 277.817,102.684 277.817,104.385 275.209,106.993 271.767,106.993 272.08,107.305 272.08,108.201 C2.1 274.828,109.608 274.828,111.506 ; 274.828,111.506 275.434,112.112 275.434,114.017 ; 274.828,111.506 274.828,113.411 275.434,114.017
pads on no net: B1.2 B1.3 B1.5 B1.6 B2.2 B2.3 B2.5 B2.6 B3.2 B3.3 B3.5 B3.6 B4.2 B4.3 B4.5 B4.6 P1.6 P1.7 P1.8 P2.6 P2.7 P2.8 P3.6 P3.7 P3.8 P4.6 P4.7 P4.8 P5.6 P5.7 P5.8 P6.6 P6.7 P6.8 P7.6 P7.7 P7.8 P8.6 P8.7 P8.8 P9.6 P9.7 P9.8 P10.6 P10.7 P10.8 P16.2@260.737,118.912 P16.3 P17.1 P17.2 P17.3 P17.4 P17.5 P17.6 P17.7 P17.8 P17.9 P18.1 P18.2 P18.3 P18.4 P18.5 P18.6 P18.7 P18.8 P18.9 P19.1 P19.2 P19.3 P19.4 P19.5 P19.6 P19.7 P19.8 P19.9 P20.1 P20.2 P20.3 P20.4 P20.5 P20.6 P20.7 P20.8 P20.9 P21.1 P21.2 P21.3 P21.4 P21.5 P21.6 P21.7 P21.8 P21.9 P22.1 P22.2 P22.3 P22.4 P22.5 P22.6 P22.7 P22.8 P22.9 P23.1 P23.2 P23.3 P23.4 P23.5 P23.6 P23.7 P23.8 P23.9 P24.1 P24.2 P24.3 P24.4 P24.5 P24.6 P24.7 P24.8 P24.9 P25.1 P25.2 P25.3 P25.4 P25.5 P25.6 P25.7 P25.8 P25.9 P26.1 P26.2 P26.3 P26.4 P26.5 P26.6 P26.7 P26.8 P26.9 POT1.4 POT1.5 POT1.6 POT1.7 POT2.4 POT2.5 POT2.6 POT2.7 SW1.1 SW1.4 SW1.5 U1.29 U1.30 U1.32 U1.33 U1.34 U1.35 U1.36 U1.37

## Polygon pours and split planes (outlines as drawn)
GND on Bottom Layer "GND" (solid, remove dead copper, pour order 0): 28.956,90.55 28.956,125.984 278.765,125.984 278.765,90.426

## Other copper
Top Layer:
  rectangle net GND: 235.585,111.506 236.601,121.412
  rectangle net GND: 247.523,111.506 248.539,121.412
  rectangle net GND: 207.391,111.506 208.407,121.412
  rectangle net GND: 219.456,111.506 220.472,121.412

## Silkscreen, mask and mechanical layers (free items; w line width, h text height)
Top Overlay:
  circle w0.254: c39.87,12.192 r2.989
  circle w0.254: c267.327,12.192 r2.989
  circle w0.254: c242.054,12.192 r2.989
  circle w0.254: c216.781,12.192 r2.989
  circle w0.254: c191.508,12.192 r2.989
  circle w0.254: c166.235,12.192 r2.989
  circle w0.254: c140.962,12.192 r2.989
  circle w0.254: c115.689,12.192 r2.989
  circle w0.254: c90.416,12.192 r2.989
  circle w0.254: c65.143,12.192 r2.989
  circle w0.254: c278.13,98.806 r2.989
  circle w0.254: c200.406,104.267 r2.989
  circle w0.254: c142.875,121.031 r2.989
  text "1" at 107.696,120.396 h2.54
  text "2" at 122.555,120.396 h2.54
  text "3" at 175.006,120.269 h2.54
  text "4" at 192.024,120.269 h2.54
  text "2" at 156.083,120.142 h2.54
  text "1" at 137.287,119.888 h2.54
  text "AG" at 33.02,119.634 h1.27 r90
  text "A21" at 71.12,119.634 h1.27 r90
  text "Vin" at 30.48,119.507 h1.27 r90
  text "39" at 73.66,119.507 h1.27 r90
  text "38" at 76.2,119.507 h1.27 r90
  text "34" at 86.614,119.507 h1.27 r90
  text "3.3V" at 35.56,119.38 h1.27 r90
  text "23" at 37.973,119.38 h1.27 r90
  text "13" at 63.5,119.38 h1.27 r90
  text "gnd" at 65.913,119.38 h1.27 r90
  text "A22" at 68.58,119.38 h1.27 r90
  text "37" at 78.867,119.38 h1.27 r90
  text "36" at 81.407,119.38 h1.27 r90
  text "35" at 83.947,119.38 h1.27 r90
  text "33" at 89.154,119.38 h1.27 r90
  text "22" at 40.513,119.253 h1.27 r90
  text "21" at 43.307,119.253 h1.27 r90
  text "20" at 45.847,119.253 h1.27 r90
  text "16" at 55.753,119.253 h1.27 r90
  text "14" at 60.96,119.253 h1.27 r90
  text "19" at 48.387,119.126 h1.27 r90
  text "18" at 50.927,119.126 h1.27 r90
  text "17" at 53.34,119.126 h1.27 r90
  text "15" at 58.547,119.126 h1.27 r90
  text "ON" at 279.146,112.395 h2.54 r90
  text "+" at 281.559,110.871 h1.27 r90
  text "OFF" at 271.399,110.236 h2.54 r90
  text "-" at 281.432,108.712 h1.27 r180
  text "PneuBot" at 133.324,100.33 h4
  text "artemd@mit.edu" at 169.672,100.33 h2
  text "V1" at 161.798,100.076 h4
  text "1" at 35.687,95.885 h1.27 r90
  text "7" at 50.8,95.885 h1.27 r90
  text "0" at 33.147,95.631 h1.27 r90
  text "2" at 38.1,95.631 h1.27 r90
  text "3" at 40.767,95.631 h1.27 r90
  text "4" at 43.307,95.631 h1.27 r90
  text "6" at 48.387,95.631 h1.27 r90
  text "8" at 53.467,95.631 h1.27 r90
  text "8" at 56.007,95.631 h1.27 r90
  text "5" at 45.974,95.504 h1.27 r90
  text "11" at 61.214,95.25 h1.27 r90
  text "31" at 86.487,94.996 h1.27 r90
  text "12" at 63.5,94.742 h1.27 r90
  text "25" at 71.374,94.615 h1.27 r90
  text "28" at 78.867,94.615 h1.27 r90
  text "29" at 81.534,94.615 h1.27 r90
  text "10" at 58.547,94.488 h1.27 r90
  text "24" at 68.961,94.488 h1.27 r90
  text "27" at 76.327,94.488 h1.27 r90
  text "30" at 84.201,94.488 h1.27 r90
  text "6" at 164.084,94.488 h2.79
  text "26" at 73.914,94.361 h1.27 r90
  text "32" at 89.154,94.361 h1.27 r90
  text "GND" at 106.045,94.361 h1.27 r90
  text "4" at 112.141,94.361 h2.79
  text "5V" at 116.586,94.361 h1.27 r90
  text "5" at 139.309,94.361 h2.79
  text "8" at 214.376,94.361 h2.79
  text "GND" at 258.191,94.361 h1.27 r90
  text "5V" at 268.732,94.361 h1.27 r90
  text "PUMP" at 121.539,94.234 h1.27 r90
  text "9" at 239.141,94.234 h2.79
  text "10" at 263.779,94.234 h2.79
  text "PUMP" at 273.685,94.234 h1.27 r90
  text "3" at 92.329,94.107 h2.79
  text "3.3V" at 118.999,94.107 h1.27 r90
  text "GND" at 157.226,94.107 h1.27 r90
  text "5V" at 167.767,94.107 h1.27 r90
  text "7" at 189.103,94.107 h2.79
  text "GND" at 232.918,94.107 h1.27 r90
  text "5V" at 243.459,94.107 h1.27 r90
  text "3.3V" at 271.145,94.107 h1.27 r90
  text "PRES" at 123.952,93.98 h1.27 r90
  text "GND" at 131.445,93.98 h1.27 r90
  text "5V" at 141.986,93.98 h1.27 r90
  text "PUMP" at 172.72,93.98 h1.27 r90
  text "GND" at 182.118,93.98 h1.27 r90
  text "5V" at 192.659,93.98 h1.27 r90
  text "PUMP" at 248.412,93.98 h1.27 r90
  text "PRES" at 276.098,93.98 h1.27 r90
  text "SOL" at 126.365,93.853 h1.27 r90
  text "PUMP" at 146.939,93.853 h1.27 r90
  text "3.3V" at 170.18,93.853 h1.27 r90
  text "PUMP" at 197.612,93.853 h1.27 r90
  text "GND" at 207.645,93.853 h1.27 r90
  text "5V" at 218.186,93.853 h1.27 r90
  text "3.3V" at 245.872,93.853 h1.27 r90
  text "SOL" at 278.511,93.853 h1.27 r90
  text "3.3V" at 144.399,93.726 h1.27 r90
  text "PRES" at 175.133,93.726 h1.27 r90
  text "3.3V" at 195.072,93.726 h1.27 r90
  text "PUMP" at 223.139,93.726 h1.27 r90
  text "PRES" at 250.825,93.726 h1.27 r90
  text "PRES" at 149.352,93.599 h1.27 r90
  text "SOL" at 177.546,93.599 h1.27 r90
  text "PRES" at 200.025,93.599 h1.27 r90
  text "3.3V" at 220.599,93.599 h1.27 r90
  text "SOL" at 253.238,93.599 h1.27 r90
  text "SOL" at 151.765,93.472 h1.27 r90
  text "SOL" at 202.438,93.472 h1.27 r90
  text "PRES" at 225.552,93.472 h1.27 r90
  text "gnd" at 30.226,93.345 h1.27 r90
  text "SOL" at 227.965,93.345 h1.27 r90
  text "3.3V" at 66.167,92.202 h1.27 r90
  text "1" at 51.816,91.694 h2.79
  text "2" at 76.708,91.059 h2.79
Mechanical 2:
  lines w0.508: 26.797,121.793 26.797,93.853 ccw(c31.051,94.424) 31.623,90.17 278.257,90.17 ; 26.806,121.539 cw(c31.06,122.111) 30.489,126.365 ; 30.729,126.365 277.236,126.365 ; 277.241,126.365 cw(c277.812,122.111) 282.067,122.682 ; 278.384,90.17 ccw(c277.812,94.424) 282.067,94.996 282.067,122.555
Mechanical 6:
  lines w0.1: 26.67,88.138 52.197,88.138 ; 51.943,88.138 77.47,88.138 ; 77.216,88.138 102.743,88.138 ; 102.489,88.138 128.016,88.138 ; 127.762,88.138 153.289,88.138 ; 153.035,88.138 178.562,88.138 ; 178.308,88.138 203.835,88.138 ; 203.581,88.138 229.108,88.138 ; 228.854,88.138 254.381,88.138 ; 254.127,88.138 279.654,88.138
  lines w0.508: 28.448,12.192 ccw(c31.369,12.192) 31.369,9.271 ; 28.462,12.191 28.313,79.375 51.689,79.375 51.689,12.065 ; 31.242,9.271 48.768,9.271 ccw(c48.768,12.192) 51.689,12.192 ; 53.721,12.192 ccw(c56.642,12.192) 56.642,9.271 ; 53.735,12.191 53.586,79.375 76.962,79.375 76.962,12.065 ; 56.515,9.271 74.041,9.271 ccw(c74.041,12.192) 76.962,12.192 ; 78.994,12.192 ccw(c81.915,12.192) 81.915,9.271 ; 79.008,12.191 78.859,79.375 102.235,79.375 102.235,12.065 ; 81.788,9.271 99.314,9.271 ccw(c99.314,12.192) 102.235,12.192 ; 104.267,12.192 ccw(c107.188,12.192) 107.188,9.271 ; 104.281,12.191 104.132,79.375 127.508,79.375 127.508,12.065 ; 107.061,9.271 124.587,9.271 ccw(c124.587,12.192) 127.508,12.192 ; 129.54,12.192 ccw(c132.461,12.192) 132.461,9.271 ; 129.554,12.191 129.405,79.375 152.781,79.375 152.781,12.065 ; 132.334,9.271 149.86,9.271 ccw(c149.86,12.192) 152.781,12.192 ; 154.813,12.192 ccw(c157.734,12.192) 157.734,9.271 ; 154.827,12.191 154.678,79.375 178.054,79.375 178.054,12.065 ; 157.607,9.271 175.133,9.271 ccw(c175.133,12.192) 178.054,12.192 ; 180.086,12.192 ccw(c183.007,12.192) 183.007,9.271 ; 180.1,12.191 179.951,79.375 203.327,79.375 203.327,12.065 ; 182.88,9.271 200.406,9.271 ccw(c200.406,12.192) 203.327,12.192 ; 205.359,12.192 ccw(c208.28,12.192) 208.28,9.271 ; 205.373,12.191 205.224,79.375 228.6,79.375 228.6,12.065 ; 208.153,9.271 225.679,9.271 ccw(c225.679,12.192) 228.6,12.192 ; 230.632,12.192 ccw(c233.553,12.192) 233.553,9.271 ; 230.646,12.191 230.497,79.375 253.873,79.375 253.873,12.065 ; 233.426,9.271 250.952,9.271 ccw(c250.952,12.192) 253.873,12.192 ; 255.905,12.192 ccw(c258.826,12.192) 258.826,9.271 ; 255.919,12.191 255.77,79.375 279.146,79.375 279.146,12.065 ; 258.699,9.271 276.225,9.271 ccw(c276.225,12.192) 279.146,12.192
  text "37x260mm" at 250.19,133.985 h2.03